# Altium PCB [PCB]_Main.PcbDoc (part 1 of 2)
Units mm, origin at the board's own origin, x right, y up, seen from the top; angles counter-clockwise.
Board outline 74 x 97 mm, 2 copper layers (Top Layer, Bottom Layer); 95 components, 55 nets, 265 pads, 42 vias.
Unrouted connection lines stored in the file: 7.
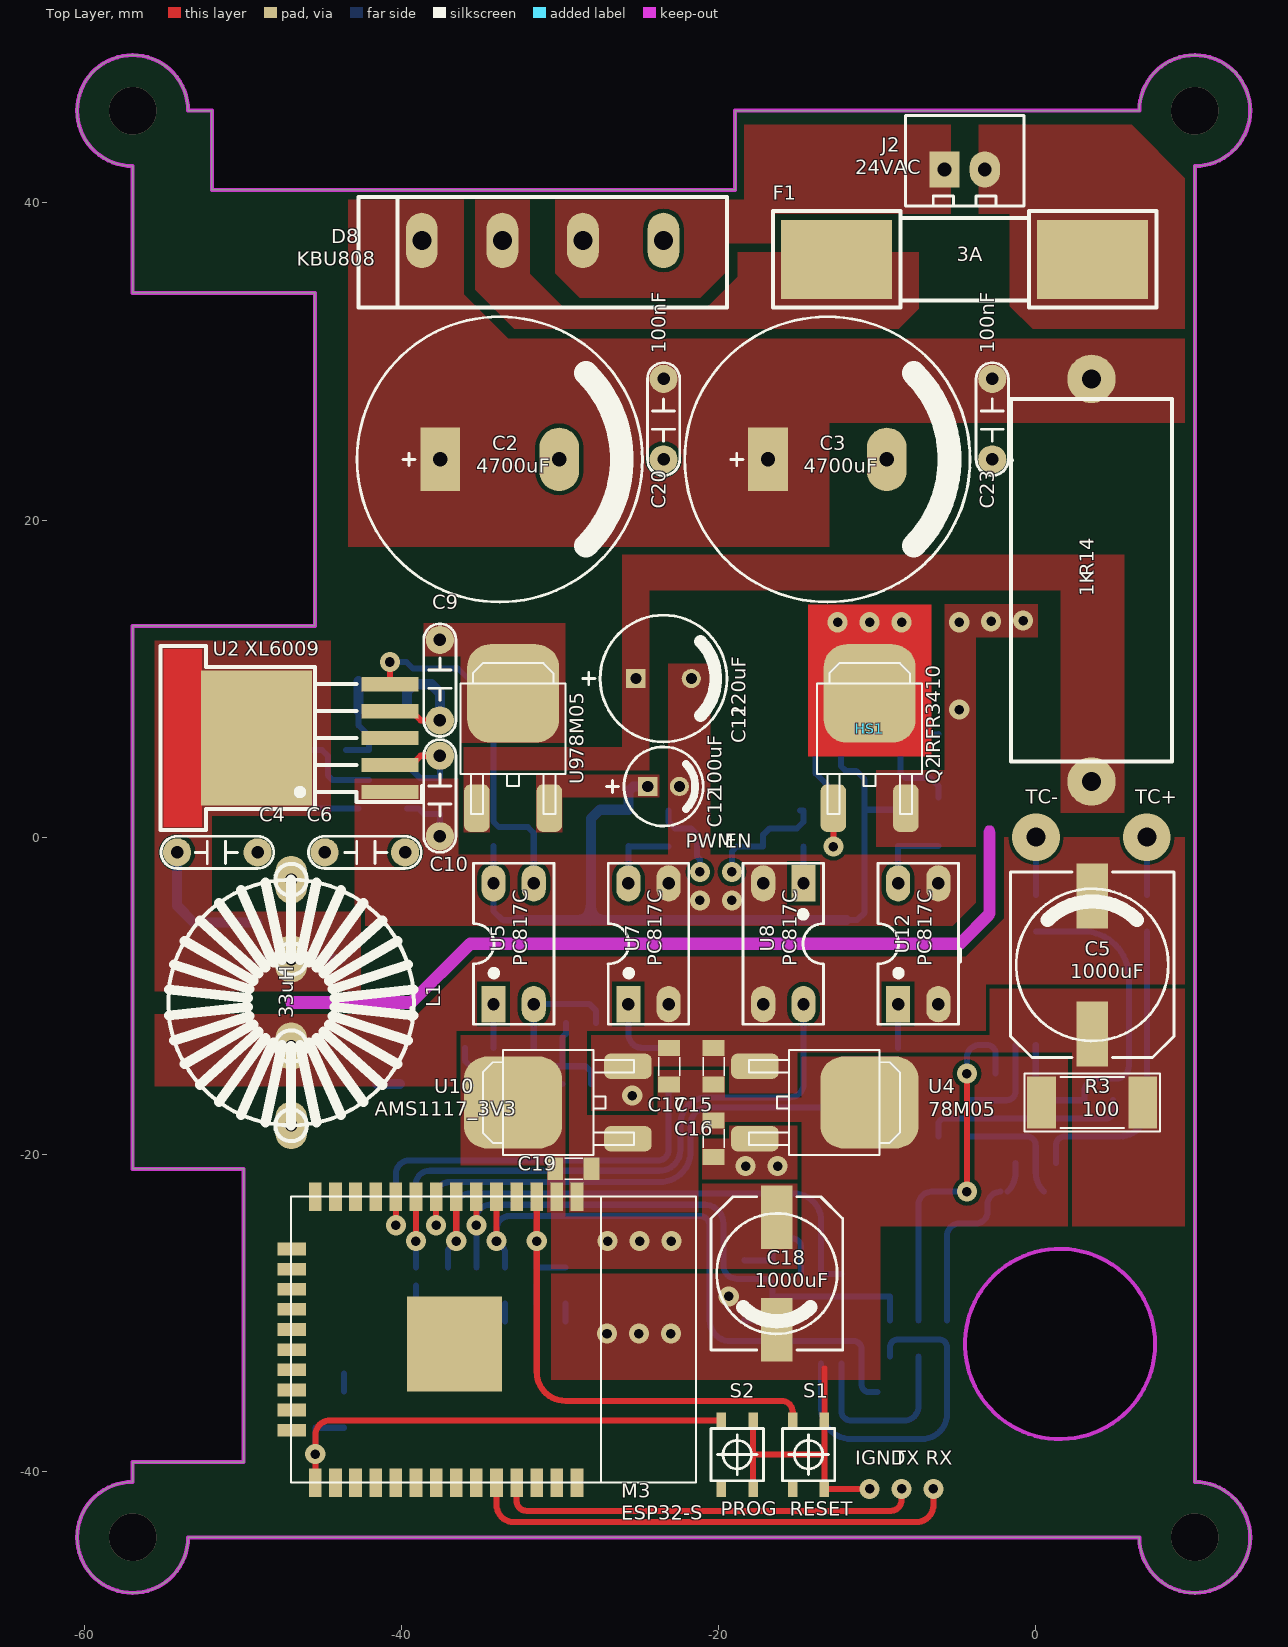
[diagram p0: Top Layer view]
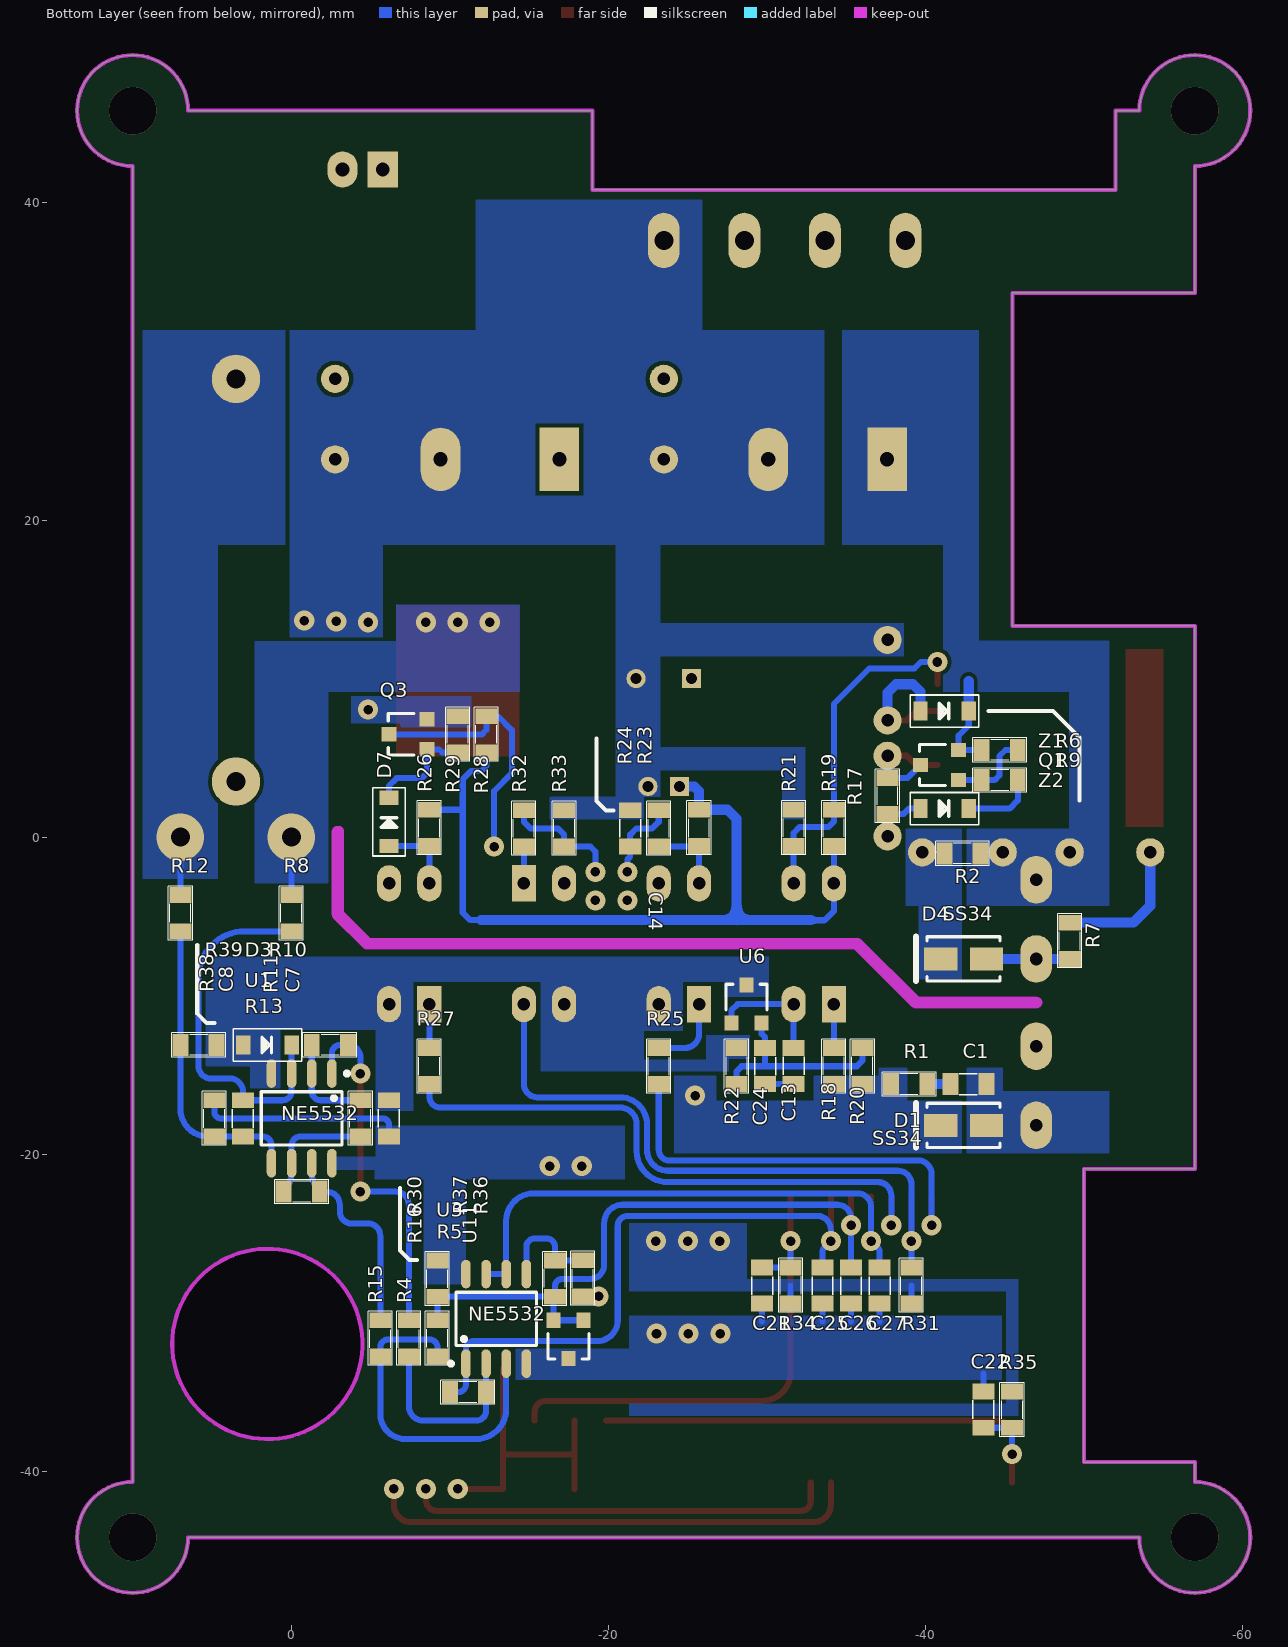
[diagram p1: Bottom Layer view, seen from below]
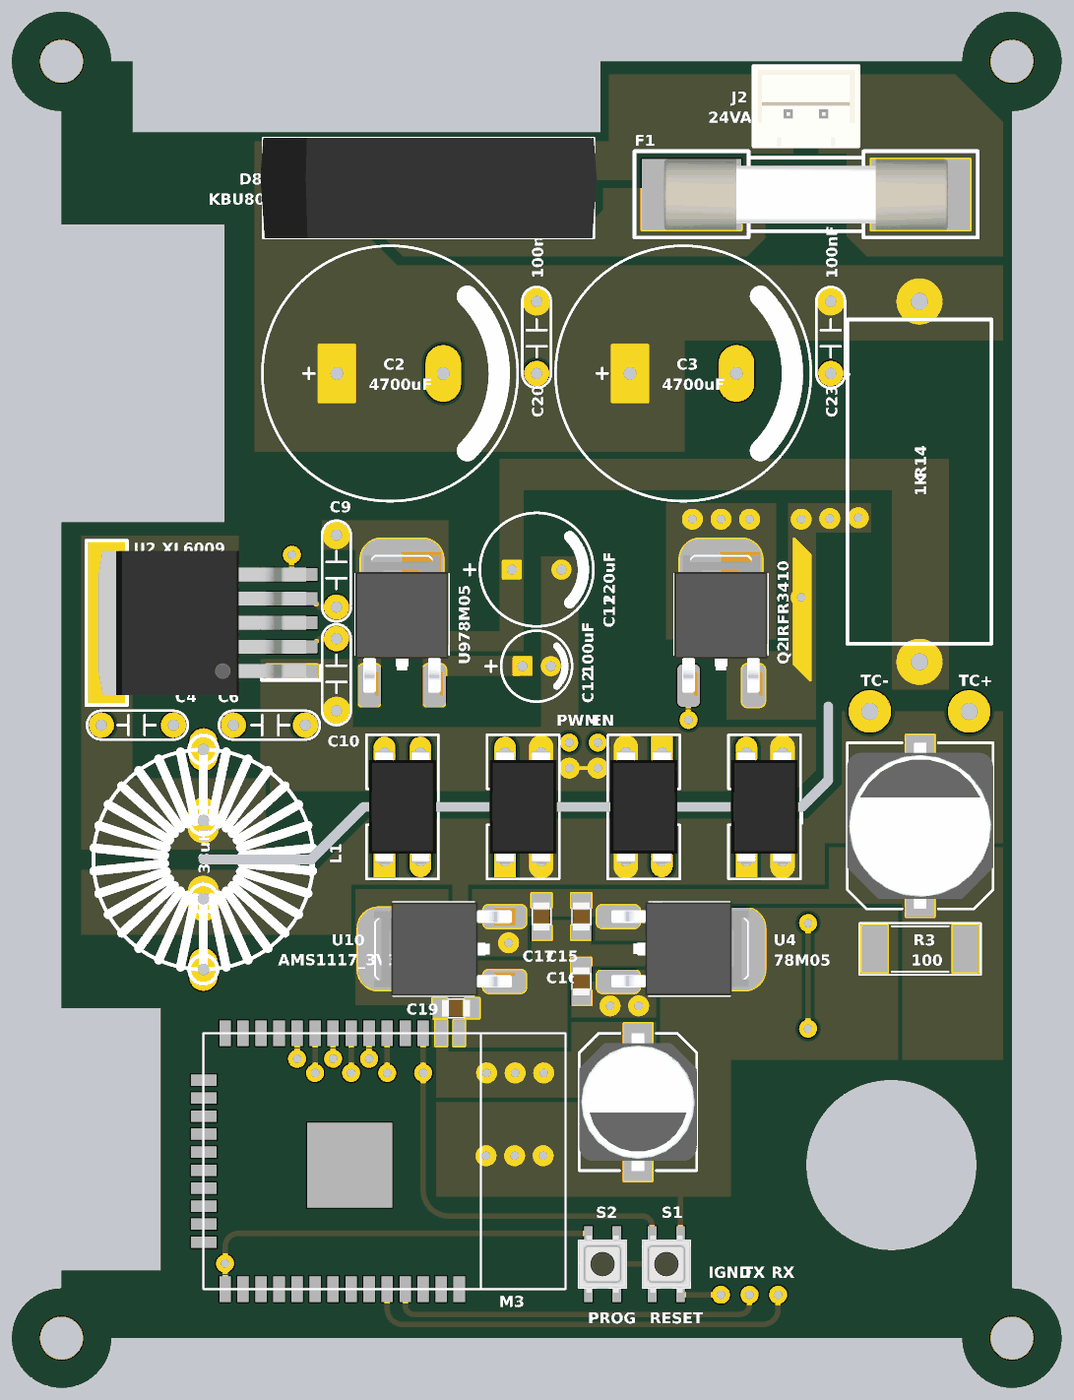
[diagram p2: 3D render of the assembled board from above, using the file's embedded part models]
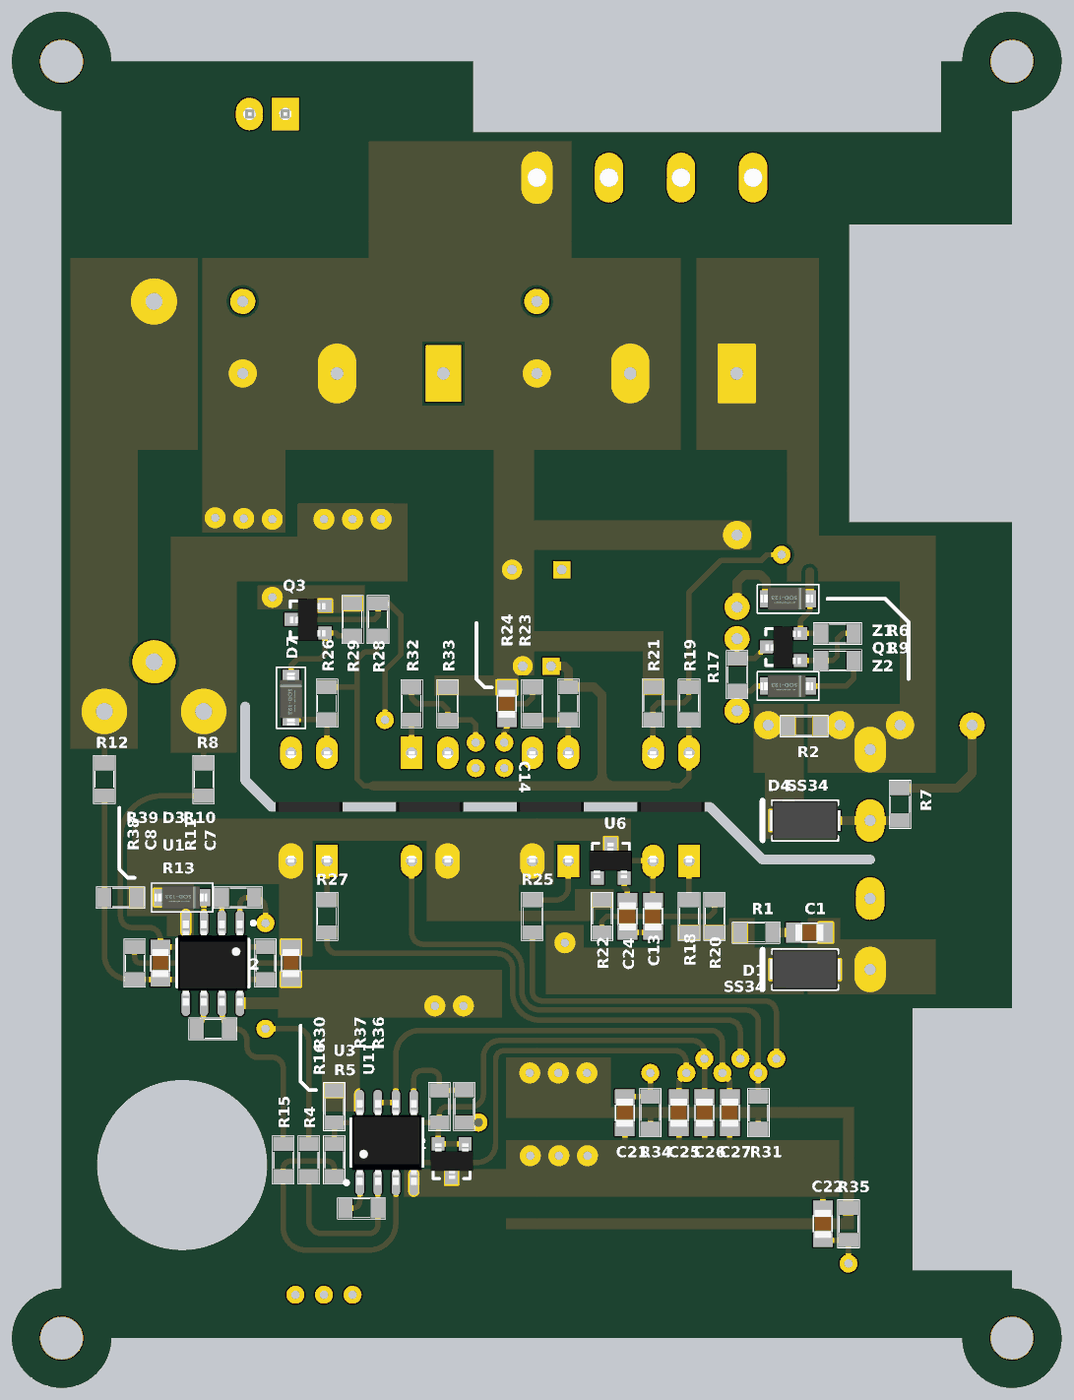
[diagram p3: 3D render of the assembled board from below, using the file's embedded part models]

## Layer stack, top to bottom
Top Solder: solder mask 0.0102, Solder Resist, Dk 3.5
Top Layer: signal copper 0.0356
Dielectric 1: dielectric 0.32, FR-4, Dk 4.8
Bottom Layer: signal copper 0.0356
Bottom Solder: solder mask 0.0102, Solder Resist, Dk 3.5

## Board outline
-56.983,-40.676 -56.983,-39.426 -49.983,-39.426 -49.983,-20.926 -56.983,-20.926 -56.983,13.324 -45.483,13.324 -45.483,34.324 -56.983,34.324 -56.983,42.324 cw(c-56.983,45.824) -53.483,45.824 -51.983,45.824 -51.983,40.824 -18.983,40.824 -18.983,45.824 6.517,45.824 cw(c10.017,45.824) 10.017,42.324 10.017,-40.676 cw(c10.017,-44.176) 6.517,-44.176 -53.483,-44.176 cw(c-56.983,-44.176)
cut-out: -46.986,-10.787 -39.387,-10.787 ccw(c-39.387,-10.437) -39.139,-10.685 -35.534,-7.079 -4.804,-7.079 ccw(c-4.804,-6.729) -4.556,-6.977 -2.687,-5.107 ccw(c-2.934,-4.859) -2.584,-4.859 -2.584,0.348 ccw(c-2.934,0.348) -3.285,0.348 -3.285,-4.714 -4.949,-6.378 -35.679,-6.378 ccw(c-35.679,-6.729) -35.927,-6.481 -39.532,-10.087 -46.986,-10.087 ccw(c-46.986,-10.437)
cut-out: -4.483,-31.976 ccw(c1.517,-31.976) 1.517,-37.976 ccw(c1.517,-31.976) 7.517,-31.976 ccw(c1.517,-31.976) 1.517,-25.976 ccw(c1.517,-31.976)

## Design rules (kind name [scope] priority, off if disabled: settings)
Clearance [All] p1: gap=0.254 ignorepadtopadclearanceinfootprint=FALSE except(0: Arc-Hole Track-Hole SMDPad-Hole THPad-Hole Via-Hole Fill-Hole Poly-Hole Region-Hole Text-Hole)
PolygonConnect [All] p1: connectstyle=Direct reliefconductorwidth=0.508 reliefentries=4 polygonreliefangle="90 Angle" airgapwidth=0.254
RoutingVias [All] p1: holewidth=0.711 width=1.27 viastyle="Through Hole" minholewidth=0.711 minwidth=1.27 maxholewidth=0.711 maxwidth=1.27
SolderMaskExpansion [All] p1: expansion=0.102
Width [All] p1: maxlimit=1.143 minlimit=0.381 preferedwidth=0.635 minimp=50.000000 maximp=50.000000 favimp=50.000000
30 further rules are at their usual default settings.

## Components (designator, comment, footprint, x,y, rotation, side; value= is the part's Value field where it differs from the comment)
C1 "104" CAP-SMD-0805 -42.708,-15.587 r180 bottom
C2 "4700uF" CAP_AL_DIP_18X35 -33.826,23.824 r0 top
C3 "4700uF" CAP_AL_DIP_18X35 -13.156,23.824 r0 top
C4 "104" CAP_NON_200mil -54.175,-0.965 r0 top
C5 "1000uF" CAP_SMD_G 3.549,-8.061 r90 top
C6 "104" CAP_NON_200mil -39.791,-0.965 r180 top
C7 "104" CAP-SMD-0805 -6.154,-17.743 r270 bottom
C8 "33pF" CAP-SMD-0805 3.056,-17.743 r90 bottom
C9 "104" CAP_NON_200mil -37.602,12.437 r270 top
C10 "104" CAP_NON_200mil -37.602,5.129 r270 top
C11 "220uF" CAP_AL_DIP_8x11.5 -23.491,9.997 r0 top
C12 "100uF" CAP_AL_DIP_5x11 -23.491,3.192 r0 top
C13 "103" CAP-SMD-0805 -31.679,-14.444 r270 bottom
C14 "103" CAP-SMD-0805 -21.372,0.547 r270 bottom
C15 "104" CAP-SMD-0805 -20.334,-14.458 r90 top
C16 "104" CAP-SMD-0805 -20.334,-19.03 r270 top
C17 "104" CAP-SMD-0805 -23.144,-14.458 r90 top
C18 "1000uF" CAP_SMD_F -16.343,-27.539 r270 top
C19 "104" CAP-SMD-0805 -29.176,-20.926 r180 top
C20 "100nF" CAP_NON_200mil -23.491,23.824 r90 top
C21 "103" CAP-SMD-0805 -29.689,-28.284 r90 bottom
C22 "103" CAP-SMD-0805 -43.652,-36.118 r270 bottom
C23 "100nF" CAP_NON_200mil -2.758,23.824 r90 top
C24 "103" CAP-SMD-0805 -29.879,-14.444 r90 bottom
C25 "102" CAP-SMD-0805 -33.499,-28.284 r90 bottom
C26 "102" CAP-SMD-0805 -35.299,-28.284 r90 bottom
C27 "102" CAP-SMD-0805 -37.099,-28.284 r90 bottom
D1 "SS34" DO-214AC -42.508,-18.207 r90 bottom
D3 "1N4007" DIO-SMD-123 1.51,-13.118 r0 bottom
D4 "SS34" DO-214AC -42.508,-7.707 r90 bottom
D7 "1N4007" DIO-SMD-123 -6.157,0.962 r270 bottom
D8 "KBU808" DIODE_KBU -31.116,37.631 r180 top
F1 "3A" FUSE_SMD_DIP -4.497,36.447 r180 top
HS1 "ALU_8.8X8.8X5" HEATSINK_ALU_8.8X8.8X5_TO252 -10.495,6.84 r0 top
J2 "24VAC" "Header 2P" -4.497,42.113 r0 top
L1 "33uH" IND_4426_COUPLED -46.986,-10.437 r270 top
M3 "ESP32-S" ESP32-S-Footprint -46.983,-22.684 r270 top
Q1 "SS8550" SOT23(123) -40.878,4.543 r90 bottom
Q2 "IRFR3410" TO252AA -10.495,5.888 r0 top
Q3 "SS8050" SOT23(123) -7.357,6.486 r90 bottom
R1 "330" RES_330_SMD_0805 -38.965,-15.587 r180 bottom
R2 "10K" RES_10K_SMD_0805 -42.331,-1.036 r180 bottom
R3 "100" RES_100_SMD_2512 3.549,-16.744 r0 top
R4 "10K" RES_10K_SMD_0805 -7.41,-31.623 r90 bottom
R5 "10K" RES_10K_SMD_0805 -11.137,-35.017 r180 bottom
R6 "10K" RES_10K_SMD_0805 -44.678,5.493 r0 bottom
R7 "10K" RES_10K_SMD_0805 -49.095,-6.544 r90 bottom
R8 "20K" RES_20K_SMD_0805 0,-4.8 r270 bottom
R9 "10K" RES_10K_SMD_0805 -44.678,3.593 r0 bottom
R10 "10K" RES_10K_SMD_0805 -2.427,-13.118 r0 bottom
R11 "10K" RES_10K_SMD_0805 -4.354,-17.743 r270 bottom
R12 "20K" RES_20K_SMD_0805 7,-4.8 r270 bottom
R13 "10K" RES_10K_SMD_0805 -0.649,-22.368 r0 bottom
R14 "1K" RES_1K_5W_AXIAL_1000MIL 3.5,16.2 r90 top value=0.1
R15 "10K" RES_10K_SMD_0805 -5.61,-31.623 r90 bottom
R16 "10K" RES_10K_SMD_0805 -9.21,-31.623 r270 bottom
R17 "10K" RES_10K_SMD_0805 -37.602,2.589 r270 bottom
R18 "5K6" RES_5K6_SMD_0805 -34.219,-14.444 r270 bottom
R19 "5K6" RES_5K6_SMD_0805 -34.219,0.581 r270 bottom
R20 "5K6" RES_5K6_SMD_0805 -36.019,-14.444 r270 bottom
R21 "1K2" RES_1K2_SMD_0805 -31.679,0.581 r270 bottom
R22 "3K" RES_3K_SMD_0805 -28.079,-14.444 r270 bottom
R23 "5K6" RES_5K6_SMD_0805 -25.712,0.581 r90 bottom
R24 "120K" RES_120K_SMD_0805 -23.172,0.547 r270 bottom
R25 "3K" RES_3K_SMD_0805 -23.172,-14.444 r90 bottom
R26 "5K6" RES_5K6_SMD_0805 -8.697,0.581 r90 bottom
R27 "3K" RES_3K_SMD_0805 -8.697,-14.444 r90 bottom
R28 "3K" RES_3K_SMD_0805 -12.297,6.475 r270 bottom
R29 "20K" RES_20K_SMD_0805 -10.497,6.475 r270 bottom
R30 "1K2" RES_1K2_SMD_0805 -9.21,-27.852 r90 bottom
R31 "3K" RES_3K_SMD_0805 -39.109,-28.284 r90 bottom
R32 "3K" RES_3K_SMD_0805 -14.665,0.546 r270 bottom
R33 "5K6" RES_5K6_SMD_0805 -17.205,0.547 r270 bottom
R34 "3K" RES_3K_SMD_0805 -31.489,-28.284 r270 bottom
R35 "3K" RES_3K_SMD_0805 -45.459,-36.118 r90 bottom
R36 "10K" RES_10K_SMD_0805 -18.376,-27.833 r90 bottom
R37 "10K" RES_10K_SMD_0805 -16.62,-27.852 r270 bottom
R38 "10K" RES_10K_SMD_0805 4.856,-17.743 r90 bottom
R39 "10K" RES_10K_SMD_0805 5.857,-13.118 r0 bottom
S1 "RESET" SW_TACT_3X3X1.5_SMD -14.343,-38.955 r90 top
S2 "PROG" SW_TACT_3X3X1.5_SMD -18.843,-38.955 r90 top
U1 "NE5532" SOIC-8S -0.649,-17.743 r270 bottom
U2 "XL6009" TO263 -49.168,6.243 r90 top
U3 "NE5532" SOIC-8S -12.915,-30.392 r90 bottom
U4 "78M05" TO252AA -13.67,-16.744 r270 top
U5 "PC817C" DIP4 -32.949,-6.729 r0 top
U6 "TL431" SOT23(132) -28.707,-10.539 r180 bottom
U7 "PC817C" DIP4 -24.442,-6.729 r0 top
U8 "PC817C" DIP4 -15.935,-6.729 r180 top
U9 "78M05" TO252AA -32.983,5.888 r0 top
U10 "AMS1117_3V3" TO252AA -29.808,-16.744 r90 top
U11 "TL431" SOT23(132) -17.477,-31.68 r0 bottom
U12 "PC817C" DIP4 -7.427,-6.729 r0 top
Z1 "6V8" DIO-SMD-123 -41.202,7.943 r0 bottom
Z2 "10V" DIO-SMD-123 -41.202,1.793 r0 bottom

## Footprints (in the part's own frame and the unit in brackets; to place one, negate y for a bottom-side part, rotate by r counter-clockwise, add the part's x,y. Pads: shape width x height; smd on the part's side, far side on the other; paste and mask are expansions set on the pad)
CAP-SMD-0805 [mil]
  rect 39.37x55 smd: 1(-45,0) 2(45,0)
  silkscreen extent -23,-26 22,26, body extent -39,-24 39,24, height 37
CAP_AL_DIP_5x11 [mm]
  rect 1.208x1.208 hole 0.7: 1(-1,0)
  round 1.208 hole 0.7: 2(1,0)
  silkscreen extent -3.6,-2.5 2.5,2.5, body extent -2.54,-2.5 2.5,3.81, height 11
CAP_AL_DIP_8x11.5 [mm]
  rect 1.208x1.208 hole 0.7: 1(-1.75,0)
  round 1.208 hole 0.7: 2(1.75,0)
  silkscreen extent -5.1,-4 4,4, body extent -4,-4 4,4, height 11.55
CAP_AL_DIP_18X35 [mm]
  rect 2.5x4 hole 0.9: 1(-3.75,0)
  oval 2.5x4 hole 0.9: 2(3.75,0)
  silkscreen extent -9,-9 9,9, body extent -9.14,-9.14 9.14,9.14, height 35
CAP_NON_200mil [mil]
  round 70 hole 31: 1(0,0) 2(200,0)
  silkscreen extent -40,-40 240,40, body extent -15,-33 215,33, height 288
CAP_SMD_F [mm]
  rect 4x2 smd: 1(-3.55,0) 2(3.55,0)
  silkscreen extent -4.85,-4.15 4.83,4.15, body extent -4.85,-4.15 4.85,4.15, height 10.2
CAP_SMD_G [mm]
  rect 4.1x2 smd: 1(-4.35,0) 2(4.35,0)
  silkscreen extent -5.85,-5.15 5.85,5.15, body extent -5.85,-5.15 5.85,5.15, height 10.2
DIO-SMD-123 [mm]
  rect 0.9x1.2 smd: 1(1.524,0) 2(-1.524,0)
  silkscreen extent -2.16,-1.02 2.16,1.02, body extent -1.76,-0.8 1.94,0.8, height 1.25
DIODE_KBU [mm]
  oval 2x3.5 hole 1.2: 1(-2.54,0) 2(2.54,0) 3(-7.62,0) 4(7.62,0)
  silkscreen extent -11.62,-2.75 11.62,4.23, body extent -11.85,-2.81 11.85,4.29, height 19.3
DIP4 [mil]
  rect 60x90 hole 31: 1(-50,-150)
  oval 60x90 hole 31: 2(50,-150) 3(50,150) 4(-50,150)
  silkscreen extent -100,-200 100,200, body extent -93,-155 93,155, height 185
DO-214AC [mm]
  rect 1.45x2.1 smd: 1(0.02,-1.343) 2(0.02,1.557)
  silkscreen extent -1.38,-2.19 1.42,3.11, body extent -1.37,-2.41 1.41,2.63, height 2.29
ESP32-S-Footprint [mm]
  rect 1.8x0.8 smd: 1(0,18.034) 2(0,16.764) 3(0,15.494) 4(0,14.224) 5(0,12.954) 6(0,11.684) 7(0,10.414) 8(0,9.144) 9(0,7.874) 10(0,6.604) 11(0,5.334) 12(0,4.064) 13(0,2.794) 14(0,1.524) 25(18.034,1.524) 26(18.034,2.794) 27(18.034,4.064) 28(18.034,5.334) 29(18.034,6.604) 30(18.034,7.874) 31(18.034,9.144) 32(18.034,10.414) 33(18.034,11.684) 34(18.034,12.954) 35(18.034,14.224) 36(18.034,15.494) 37(18.034,16.764) 38(18.034,18.034)
  rect 0.8x1.8 smd: 15(3.3,0.034) 16(4.57,0.034) 17(5.84,0.034) 18(7.11,0.034) 19(8.38,0.034) 20(9.65,0.034) 21(10.92,0.034) 22(12.19,0.034) 23(13.46,0.034) 24(14.73,0.034)
  rect 6x6 smd: 101(9.3,10.3)
  silkscreen extent 0,0 18.03,25.53, body extent 0,0 18.03,25.53, height 2
FUSE_SMD_DIP [mm]
  rect 7x5 smd: 1(-8.077,0.013) 2(8.077,0.013)
  silkscreen extent -12.1,-3.05 12.1,3.05, body extent -10,-2.49 10,2.51
"Header 2P" [mil] "CON2"
  rect 75x90 hole 34: 1(-50,0)
  oval 75x90 hole 34: 2(50,0)
  silkscreen extent -147,-91 147,134, body extent -148,-90 148,134, height 277
HEATSINK_ALU_8.8X8.8X5_TO252 [mm]
  body extent -4.4,-4.4 4.4,4.4, height 7.85
IND_4426_COUPLED [mm]
  oval 3x2 hole 0.8: 1(-7.75,0) 2(-2.75,0) 3(7.75,0) 4(2.75,0)
  silkscreen extent -8.75,-7.75 8.75,7.75, body extent -8.28,-8.29 8.29,8.3, height 8.65
RES_1K2_SMD_0805 [mil]
  rect 39.37x55 smd mask+1.97: 1(-45,0) 2(45,0)
  silkscreen extent -67,-30 67,30, body extent -39,-25 39,25, height 20
RES_1K_5W_AXIAL_1000MIL [mil] "R5W , 2 pin, 400 x 950mil"
  round 120 hole 47.24: 1(-500,0) 2(500,0)
  silkscreen extent -450,-200 450,200, body extent -520,-191 520,191, height 365
RES_3K_SMD_0805 [mil]
  rect 39.37x55 smd mask+1.97: 1(-45,0) 2(45,0)
  silkscreen extent -67,-30 67,30, body extent -39,-25 39,25, height 20
RES_5K6_SMD_0805 [mil]
  rect 39.37x55 smd mask+1.97: 1(-45,0) 2(45,0)
  silkscreen extent -67,-30 67,30, body extent -39,-25 39,25, height 20
RES_10K_SMD_0805 [mil]
  rect 39.37x55 smd mask+1.97: 1(-45,0) 2(45,0)
  silkscreen extent -67,-30 67,30, body extent -39,-25 39,25, height 20
RES_20K_SMD_0805 [mil]
  rect 39.37x55 smd mask+1.97: 1(-45,0) 2(45,0)
  silkscreen extent -67,-30 67,30, body extent -39,-25 39,25, height 20
RES_100_SMD_2512 [mm] "Chip Capacitor, Body 3.2x2.5mm, IPC Medium Density"
  rect 1.8x3.3 smd: 1(-3.2,0) 2(3.2,0)
  silkscreen extent -4.28,-1.83 4.28,1.83, body extent -3.15,-1.6 3.15,1.6, height 0.71
RES_120K_SMD_0805 [mil]
  rect 39.37x55 smd mask+1.97: 1(-45,0) 2(45,0)
  silkscreen extent -67,-30 67,30, body extent -39,-25 39,25, height 20
RES_330_SMD_0805 [mil]
  rect 39.37x55 smd mask+1.97: 1(-45,0) 2(45,0)
  silkscreen extent -67,-30 67,30, body extent -39,-25 39,25, height 20
SOIC-8S [mm] "SOIC, 8-Leads, Body 4.9x3.9mm, Pitch 1.27mm, IPC High Density"
  oval 1.8x0.6 smd: 1(-2.825,1.905) 2(-2.825,0.635) 3(-2.825,-0.635) 4(-2.825,-1.905) 5(2.825,-1.905) 6(2.825,-0.635) 7(2.825,0.635) 8(2.825,1.905)
  silkscreen extent -2.95,-2.55 1.68,2.98, body extent -2.99,-2.45 3,2.45, height 1.6
SOT23(123) [mm]
  rect 0.9x0.95 smd: 1(-0.95,-1.2) 2(0,1.2) 3(0.95,-1.2)
  silkscreen extent -1.3,-0.38 1.3,1.25, body extent -1.52,-1.23 1.48,1.27, height 1.06
SOT23(132) [mm]
  rect 0.9x0.95 smd: 1(-0.95,-1.2) 2(0.95,-1.2) 3(0,1.2)
  silkscreen extent -1.3,-0.38 1.3,1.25, body extent -1.52,-1.23 1.48,1.27, height 1.06
SW_TACT_3X3X1.5_SMD [mm]
  rect 1x0.6 smd: 1(-2.163,1) 1(2.163,1) 2(-2.163,-1) 2(2.163,-1)
  silkscreen extent -1.65,-1.65 1.65,1.65, body extent -2.01,-1.69 2.01,1.69, height 1.47
TO252AA [mm]
  rrect50% 1.6x3 smd: 1(-2.286,-4.064) 3(2.286,-4.064)
  rrect50% 5.8x6.2 smd: 2(0,3.175)
  silkscreen extent -3.3,-4.44 3.3,5.08, body extent -3.3,-4.82 3.28,5.32, height 2.3
TO263 [mm]
  rect 0.9x3.58 smd: 1(-3.4,-8.42) 2(-1.7,-8.42) 3(0,-8.42) 4(1.7,-8.42) 5(3.4,-8.42)
  rect 8.5x7 smd: 3(0,0)
  Top Layer region: -5.6,5.842 5.6,5.842 5.6,3.454 -5.6,3.454
  silkscreen extent -5.8,-10.44 5.8,6.07, body extent -5.08,-9.42 5.08,5.22, height 4.57

## Part data
C1 C7 C15 C16 C17 C19 C25 C26 C27: library part CAP_NON_100NF_0805, "Multilayer SMD Ceramic Capacitors, Vmax 50V", Package=SMD, Temperature Range="-55 to +125 degC", ComponentLink1Description=Datasheet, ComponentLink1URL=E:\NEW_DATA\ELECTRONIC_DOCUMENT\DATASHEET\1723208.pdf, Container=Capacitors_Box, Label=0805-100NF, Manufacturer=https://shopee.vn/Set-100-T%E1%BB%A5-%C4%90i%E1%BB%87n-G%E1%BB%91m-0805-SMD-100pF-47uF-100pF-1nF-10nF-100nF-0.1uF-1uF-2.2uF-4.7uF-10uF-22uF-i.778834786.13694429713, Price=0.006, Stock=76
C2 C3: library part CAP_POL_4700UF_50V_DIP, "RS PRO Through Hole Aluminium Electrolytic Capacitor Low-ESR", Package=TH, Temperature Range="-40 to +105 degC", ComponentLink1Description=Datasheet, ComponentLink1URL=E:\NEW_DATA\ELECTRONIC_DOCUMENT\DATASHEET\0900766b8173e32a.pdf, Container=Capacitors_Box, Label=4700UF-50V, Manufacturer=https://shopee.vn/-2-CON-(G39.4)-T%E1%BB%A5-h%C3%B3a-4-700uF-50V-(18x35mm)-(4700uF-50V)-i.29971197.1779362195?sp_atk=89aaee08-9251-40b8-862a-376625eebb3c&xptdk=89aaee08-9251-40b8-862a-376625eebb3c, Price=0.8, Stock=0
C4 C6 C9 C10 C20 C23: library part CAP_NON_100NF_50V_DIP, "Ceramic Disc Capacitors, MCCHU Series", Package=TH, Temperature Range="-25 to +85 degC", ComponentLink1Description=Datasheet, ComponentLink1URL=E:\NEW_DATA\ELECTRONIC_DOCUMENT\DATASHEET\2577800.pdf, Container=Capacitors_Box, Label=100nF-50V, Manufacturer=https://shopee.vn/Set-100-T%E1%BB%A5-G%E1%BB%91m-50V-1pF-~-100nF-0.1uF-104-4.7PF-10PF-22PF-33PF-47PF-100PF-101-220PF-10NF-10NF-330PF-470PF-1NF-103-47NF-473-Ch%E1%BA%A5t-L%C6%B0%E1%BB%A3ng-Cao-i.778834786.17975668941?sp_atk=3a5fc38d-5123-497e-86f7-9862871296e1&xptdk=3a5fc38d-5123-497e-86f7-9862871296e1, Price=0.004, Stock=50
C5: library part CAP_POL_1000UF_16V_SMD, "ALUMINUM??ELECTROLYTIC??CAPACITORS", Package=SMD, Temperature Range="-55 to +105 degC", ComponentLink1Description=Datasheet, ComponentLink1URL=E:\NEW_DATA\ELECTRONIC_DOCUMENT\DATASHEET\e-ut.pdf, Container=Capacitors_Box, Label=1000uF-16V, Manufacturer=https://shopee.vn/Set-20-T%E1%BB%A5-%C4%90i%E1%BB%87n-Nh%C3%B4m-Smd-16v-10uf-22uf-33uf-47uf-100uf-220uf-330uf-470uf-680uf-1000uf-Chuy%C3%AAn-D%E1%BB%A5ng-i.395117932.9948514166, Price=0.08, Stock=10
C8: library part CAP_NON_33PF_0805, "Multilayer SMD Ceramic Capacitors, Vmax 50V", Package=SMD, Temperature Range="-55 to +125 degC", ComponentLink1Description=Datasheet, ComponentLink1URL=E:\NEW_DATA\ELECTRONIC_DOCUMENT\DATASHEET\1723208.pdf, Container=Capacitors_Box, Label=0805-33PF, Manufacturer=https://shopee.vn/Set-100-T%E1%BB%A5-%C4%90i%E1%BB%87n-G%E1%BB%91m-0805-SMD-100pF-47uF-100pF-1nF-10nF-100nF-0.1uF-1uF-2.2uF-4.7uF-10uF-22uF-i.778834786.13694429713, Price=0.006, Stock=25
C11: library part CAP_POL_220UF_25V_DIP, "RS PRO Through Hole Aluminium Electrolytic Capacitor Low-ESR, Rs=139mR, Ls=1.0uH", Package=TH, Temperature Range="-40 to +105 degC", ComponentLink1Description=Datasheet, ComponentLink1URL=E:\NEW_DATA\ELECTRONIC_DOCUMENT\DATASHEET\0900766b8173e32a.pdf, Container=Capacitors_Box, Label=220UF-25V, Manufacturer=https://shopee.vn/-10-CON-(G32.2)-T%E1%BB%A5-h%C3%B3a-220uF-25V-(8x12mm)-i.29971197.1779362283?sp_atk=29d1e278-aa24-4bd9-9bae-4cc1236b0b26&xptdk=29d1e278-aa24-4bd9-9bae-4cc1236b0b26, Price=0.04, Stock=14
C12: library part CAP_POL_100UF_16V_DIP, "RS PRO Through Hole Aluminium Electrolytic Capacitor Low-ESR", Package=TH, Temperature Range="-40 to +105 degC", ComponentLink1Description=Datasheet, ComponentLink1URL=E:\NEW_DATA\ELECTRONIC_DOCUMENT\DATASHEET\0900766b8173e32a.pdf, Container=Capacitors_Box, Label=100uF-16V, Manufacturer=https://shopee.vn/-25-CON-T%E1%BB%A5-h%C3%B3a-100uF-16V-(6x7mm)-i.29971197.1779362306, Price=0.028, Stock=46
C13 C14 C21 C22 C24: library part CAP_NON_10NF_0805, "Multilayer SMD Ceramic Capacitors, Vmax 50V", Package=SMD, Temperature Range="-55 to +125 degC", ComponentLink1Description=Datasheet, ComponentLink1URL=E:\NEW_DATA\ELECTRONIC_DOCUMENT\DATASHEET\1723208.pdf, Container=Capacitors_Box, Label=0805-10NF, Manufacturer=https://shopee.vn/Set-100-T%E1%BB%A5-%C4%90i%E1%BB%87n-G%E1%BB%91m-0805-SMD-100pF-47uF-100pF-1nF-10nF-100nF-0.1uF-1uF-2.2uF-4.7uF-10uF-22uF-i.778834786.13694429713, Price=0.006, Stock=89
C18: library part CAP_POL_1000UF_6.3V_SMD, "ALUMINUM??ELECTROLYTIC??CAPACITORS", Package=SMD, Temperature Range="-55 to +105 degC", ComponentLink1Description=Datasheet, ComponentLink1URL=E:\NEW_DATA\ELECTRONIC_DOCUMENT\DATASHEET\e-ut.pdf, Container=Capacitors_Box, Label=1000uF-6.3V, Manufacturer=https://shopee.vn/Set-10-t%E1%BB%A5-%C4%91i%E1%BB%87n-nh%C3%B4m-1uf-220uf-Smd-6.3v-47uf-100uf-220uf-470uf-1000uf-ch%E1%BA%A5t-l%C6%B0%E1%BB%A3ng-cao-i.395117932.8048512997?sp_atk=69990654-f080-47d0-9859-6bc27c5572f2&xptdk=69990654-f080-47d0-9859-6bc27c5572f2, Price=0.1, Stock=9
D1 D4: library part DIODE_SS34_3A_DO-214AC, "Surface-Mount Schottky Barrier Rectifier, Vr=30V", Package=SMD, Temperature Range="-55 to +150 degC", ComponentLink1Description=Datasheet, ComponentLink1URL=E:\NEW_DATA\ELECTRONIC_DOCUMENT\DATASHEET\ss32.pdf, Container=Diodes_Box, Label=Shockley, Manufacturer=https://shopee.vn/-5-CON-(KX)-Diode-D%C3%A1n-SS34-SMA-3A-40V-1N5822-(SMD-D%C3%A1n)-Diode-xung--i.29971197.1930547559?sp_atk=2e39dc6f-7249-4ff0-bc48-5163322d9dd4&xptdk=2e39dc6f-7249-4ff0-bc48-5163322d9dd4, Price=0.12, Stock=0
D3 D7: library part DIODE_1N4007_1A_SOD-323, "1A Rectifier Diodes - Vr 1000V", Package=SMD, Temperature Range="-65 to +175 degC", ComponentLink1Description=Datasheet, ComponentLink1URL=E:\NEW_DATA\ELECTRONIC_DOCUMENT\DATASHEET\1N4007-SMD.pdf, Container=Diodes_Box, Label="1N4007 T7", Manufacturer=https://shopee.vn/Set-100-Mi%E1%BA%BFng-D%C3%A1n-%C4%90i%E1%BB%91t-SMD-0805-SOD-123-1N5819-1N4007-1N4148-SOD123-SOD-323-1206-1N4148WS-1N5819WS-B5819WS-SOD323-i.778834786.19705430997?sp_atk=d684d704-d874-4419-9c16-214feca81d22&xptdk=d684d704-d874-4419-9c16-214feca81d22, Price=0.006, Stock=184
D8: library part DIODE_BRIDGE_KBU808_8A, "SINGLE-PHASE SILICON BRIDGE RECTIFIER, 800V MAX, 560Vrms, 8A.", Package=TH, Temperature Range="-55 to +125 degC", ComponentLink1Description=Datasheet, ComponentLink1URL=E:\NEW_DATA\ELECTRONIC_DOCUMENT\DATASHEET\KBU8005-hornby.pdf, Container=Diodes_Box, Label=DIODE_BRIDGE, Manufacturer=https://shopee.vn/-2-CON-(F17.5)-C%E1%BA%A7u-Diode-KBU808-8A-800V-(8A-d%E1%BA%B9t)-i.29971197.1928264848?sp_atk=6ddc136f-6260-42f4-9059-366cf929f085&xptdk=6ddc136f-6260-42f4-9059-366cf929f085, Price=0.42, Stock=0
F1: library part CON_CAR-FUSE_1A, "RESISTOR-FUSE 1 OHM +-5% 0.5W @70", Package=TH
HS1: library part HEATSINK_ALU_8.8X8.8X5, "HEATSINK ALU 8.8X8.8X5 FROM CHINA", Package=SMD, Temperature Range="-55 to +150 degC", Container=HEATSINK, Label=ALU_8.8X8.8X5, Manufacturer=https://shopee.vn/Set-5-mi%E1%BA%BFng-nh%C3%B4m-t%E1%BA%A3n-nhi%E1%BB%87t-cao-c%E1%BA%A5p-c%E1%BB%A1-8.8x8.8x5mm-cho-chip-nh%E1%BB%9B-LED-i.410956428.9172920161?xptdk=409fad90-44e0-46f3-a162-0b94c27037a3, Price=0.048, Stock=20
J2: library part JP2_IN, Package=TH
L1: library part IND_COUPLED_4426, "Transformer Lpri=33uH; Lsec=33uH.", Package=TH, Temperature Range="-40 to +125 degC", ComponentLink1Description=Datasheet, ComponentLink1URL="E:\NEW_DATA\ELECTRONIC_DOCUMENT\DATASHEET\CWS-1TC-11892 REV.A1.pdf", Container=Inductors_Box, Coupling Factor=0.95, Inductance A=33uH, Inductance B=33uH, Label=4426_33uH, Manufacturer=https://shopee.vn/Set-10-Cu%E1%BB%99n-D%C3%A2y-C%E1%BA%A3m-%E1%BB%A8ng-T%E1%BB%AB-T%C3%ADnh-5026-33-47-68-100UH-6A-i.81431289.15993908560, Price=0.1, Stock=1
M3: library part MD_ESP32-S, "Tensilica Xtensa LX6 microprocessor @ 160 or 240 MHz · 320 KiB SRAM, MCU", Package=SMD, Temperature Range="-40 to +125 degC", ComponentLink1Description=Datasheet, ComponentLink1URL=E:\NEW_DATA\ELECTRONIC_DOCUMENT\DATASHEET\esp-wroom-32_datasheet_en-1223836.pdf, Container=ICs_Box, Label=MCU, Manufacturer=https://shopee.vn/M%C3%B4-%C4%90un-Wifi-Kh%C3%B4ng-D%C3%A2y-Esp32-Esp32-Wroom-Esp32-Wrover-Esp32-Wroom-32D-32U-Esp32-Wrover-I-Ib-B-i.81431289.10939223124, Price=2.3, Stock=0
Q1: library part PNP_SS8550_SOT-23, "PNP Silicon General Purpose Transistor, Vcb=-40V, Ic=-1.5A, Y2", Package=SMD, Temperature Range="-55 to +150 degC", ComponentLink1Description=Datasheet, ComponentLink1URL=E:\NEW_DATA\ELECTRONIC_DOCUMENT\DATASHEET\SS8550.pdf, Container=Transistors_Box, Label=PNP, Manufacturer=https://shopee.vn/B%E1%BB%99-100-M%E1%BA%A1ch-%C4%90i%E1%BB%87n-SS8050-Y1-SS8550-Y2-S8050-J3Y-S8550-2TY-S9012-S9013-S9014-S9015-S9018-TL431-XC6206P332MR-SOT23-XC6206P332-i.778834786.17075451311, Price=0.006, Stock=100
Q2: library part NCH_IRFR3410_TO-252, "HEXFET  Power MOSFET, Vds=100V, Id=31A, Rds=34m", Package=SMD, Temperature Range="-55 to +170 degC", ComponentLink1Description=Datasheet, ComponentLink1URL=E:\NEW_DATA\ELECTRONIC_DOCUMENT\DATASHEET\Infineon-IRFR3410-DataSheet-v01_01-EN.pdf, Container=Transistors_Box, Label=N-CH, Manufacturer=https://item.taobao.com/item.htm?spm=a1z10.3-c-s.w4002-21047669632.10.3f9827e5NgGYbt&id=523832631224, Price=0.15, Stock=0
Q3: library part NPN_SS8050_SOT-23, "NPN Silicon Epitaxial Planar Transistor, Vcb=40V, Ic=1.5A, Y1", Package=SMD, Temperature Range="-55 to +150 degC", ComponentLink1Description=Datasheet, ComponentLink1URL=E:\NEW_DATA\ELECTRONIC_DOCUMENT\DATASHEET\1912111437_Galaxy-SS8050G-Y1_C380930.pdf, Container=Transistors_Box, Label=NPN, Manufacturer=https://shopee.vn/B%E1%BB%99-100-M%E1%BA%A1ch-%C4%90i%E1%BB%87n-SS8050-Y1-SS8550-Y2-S8050-J3Y-S8550-2TY-S9012-S9013-S9014-S9015-S9018-TL431-XC6206P332MR-SOT23-XC6206P332-i.778834786.17075451311, Price=0.005, Stock=87
R1: library part RES_330R_1/8W_0805, "Chip Resistor Surface Mount, 0.125W, Vmax 150V", Package=SMD, Temperature Range="-55 to +155 degC", ComponentLink1Description=Datasheet, ComponentLink1URL=E:\NEW_DATA\ELECTRONIC_DOCUMENT\DATASHEET\RC0805.pdf, Container=Resistors_Box, Label=0805_Pack, Manufacturer=https://shopee.vn/Set-100con-%C4%90I%E1%BB%86N-TR%E1%BB%9E-D%C3%81N-0805-c%C3%A1c-lo%E1%BA%A1i-t%E1%BB%AB-2-OHM-7-3-OHM-9-4-OHM-7-6-OHM-8-8-OHM-2-12-OHM-...750-OHM-i.633971954.14528730832, Price=0.003, Stock=70
R2 R4 R5 R6 R7 R9 R10 R11 R13 R15 R16 R17 R36 R37 R38 R39: library part RES_10K_1/8W_0805, "Chip Resistor Surface Mount, 0.125W, Vmax 150V", Package=SMD, Temperature Range="-55 to +155 degC", ComponentLink1Description=Datasheet, ComponentLink1URL=E:\NEW_DATA\ELECTRONIC_DOCUMENT\DATASHEET\RC0805.pdf, Container=Resistors_Box, Label=0805_Pack, Manufacturer=https://shopee.vn/Set-100con-%C4%90I%E1%BB%86N-TR%E1%BB%9E-D%C3%81N-0805-c%C3%A1c-lo%E1%BA%A1i-t%E1%BB%AB-1K2-3K-5K6-6K8-...820K-1M-i.633971954.15028739620, Price=0.003, Stock=19
R3: library part RES_100R_1/2W_2512, "2512 Thick Film Chip Resistor, 0.5W, Vmax 200V", Package=SMD, Temperature Range="-55 to +155 degC", ComponentLink1Description=Datasheet, ComponentLink1URL=E:\NEW_DATA\ELECTRONIC_DOCUMENT\DATASHEET\2512std.pdf, Container=Resistors_Box, Label="2512-100R 5%", Manufacturer=https://shopee.vn/Set-50-chip-%C4%90i%E1%BB%87n-T%E1%BB%AD-2512-SMD-5-1W-0.1R-0.01R-0.05R-0.001R-0.33R-1R-0R-10R-100R-2W-0.001-0.01-0.13-0.05-1-0-10-100-ohm-i.778834786.21104749216, Price=0.003, Stock=46
R8 R12 R29: library part RES_20K_1/8W_0805, "Chip Resistor Surface Mount, 0.125W, Vmax 150V", Package=SMD, Temperature Range="-55 to +155 degC", ComponentLink1Description=Datasheet, ComponentLink1URL=E:\NEW_DATA\ELECTRONIC_DOCUMENT\DATASHEET\RC0805.pdf, Container=Resistors_Box, Label=0805_Pack, Manufacturer=https://shopee.vn/Set-100con-%C4%90I%E1%BB%86N-TR%E1%BB%9E-D%C3%81N-0805-c%C3%A1c-lo%E1%BA%A1i-t%E1%BB%AB-1K2-3K-5K6-6K8-...820K-1M-i.633971954.15028739620, Price=0.003, Stock=89
R14: library part RES_1K_5W_AXIAL, "Cement Fixed Resistors Axial Leaded", Package=TH, Temperature Range="-55 to +155 degC", ComponentLink1Description=Datasheet, ComponentLink1URL=E:\NEW_DATA\ELECTRONIC_DOCUMENT\DATASHEET\3178893.pdf, Container=Resistors_TH_Box, Label=1K_5W, Manufacturer=https://shopee.vn/%C4%90i%E1%BB%87n-tr%E1%BB%9F-s%E1%BB%A9-5W-5-b%E1%BB%99-5-con-c%C3%A1c-lo%E1%BA%A1i-0.1R-100K-i.101915397.11507078815, Price=0.08, Stock=3
R18 R19 R20 R23 R26 R33: library part RES_5K6_1/8W_0805, "Chip Resistor Surface Mount, 0.125W, Vmax 150V", Package=SMD, Temperature Range="-55 to +155 degC", ComponentLink1Description=Datasheet, ComponentLink1URL=E:\NEW_DATA\ELECTRONIC_DOCUMENT\DATASHEET\RC0805.pdf, Container=Resistors_Box, Label=0805_Pack, Manufacturer=https://shopee.vn/Set-100con-%C4%90I%E1%BB%86N-TR%E1%BB%9E-D%C3%81N-0805-c%C3%A1c-lo%E1%BA%A1i-t%E1%BB%AB-1K2-3K-5K6-6K8-...820K-1M-i.633971954.15028739620, Price=0.003, Stock=40
R21 R30: library part RES_1K2_1/8W_0805, "Chip Resistor Surface Mount, 0.125W, Vmax 150V", Package=SMD, Temperature Range="-55 to +155 degC", ComponentLink1Description=Datasheet, ComponentLink1URL=E:\NEW_DATA\ELECTRONIC_DOCUMENT\DATASHEET\RC0805.pdf, Container=Resistors_Box, Label=0805_Pack, Manufacturer=https://shopee.vn/Set-100con-%C4%90I%E1%BB%86N-TR%E1%BB%9E-D%C3%81N-0805-c%C3%A1c-lo%E1%BA%A1i-t%E1%BB%AB-1K2-3K-5K6-6K8-...820K-1M-i.633971954.15028739620, Price=0.003, Stock=50
R22 R25 R27 R28 R31 R32 R34 R35: library part RES_3K_1/8W_0805, "Chip Resistor Surface Mount, 0.125W, Vmax 150V", Package=SMD, Temperature Range="-55 to +155 degC", ComponentLink1Description=Datasheet, ComponentLink1URL=E:\NEW_DATA\ELECTRONIC_DOCUMENT\DATASHEET\RC0805.pdf, Container=Resistors_Box, Label=0805_Pack, Manufacturer=https://shopee.vn/Set-100con-%C4%90I%E1%BB%86N-TR%E1%BB%9E-D%C3%81N-0805-c%C3%A1c-lo%E1%BA%A1i-t%E1%BB%AB-1K2-3K-5K6-6K8-...820K-1M-i.633971954.15028739620, Price=0.003, Stock=78
R24: library part RES_120K_1/8W_0805, "Chip Resistor Surface Mount, 0.125W, Vmax 150V", Package=SMD, Temperature Range="-55 to +155 degC", ComponentLink1Description=Datasheet, ComponentLink1URL=E:\NEW_DATA\ELECTRONIC_DOCUMENT\DATASHEET\RC0805.pdf, Container=Resistors_Box, Label=0805_Pack, Manufacturer=https://shopee.vn/Set-100con-%C4%90I%E1%BB%86N-TR%E1%BB%9E-D%C3%81N-0805-c%C3%A1c-lo%E1%BA%A1i-t%E1%BB%AB-1K2-3K-5K6-6K8-...820K-1M-i.633971954.15028739620, Price=0.003, Stock=99
S1 S2: library part CON_BUTTON_3X3X1.5MM_SMD, "Tact switch (Tactile Switch), 50mA, 12VDC.", Package=TH, Temperature Range="-25 to +85 degC", ComponentLink1Description=Datasheet, ComponentLink1URL=E:\NEW_DATA\ELECTRONIC_DOCUMENT\DATASHEET\tact-switch.pdf, Container=Connector_Fuse_Box, Label="Tact Switch 4.5X4.5X5", Manufacturer=https://shopee.vn/N%C3%BAt-Nh%E1%BA%A5n-4-Ch%C3%A2n-Vu%C3%B4ng-%C4%90en-i.101915397.10716198032, Price=0.028, Stock=10
U1 U3: library part IC_OPAMP_NE5532_SOIC-8, "NE5532x, SA5532x Dual Low-Noise Operational Amplifiers.", Package=SMD, Temperature Range="-40 to +85 degC", ComponentLink1Description=Datasheet, ComponentLink1URL=E:\NEW_DATA\ELECTRONIC_DOCUMENT\DATASHEET\ne5532.pdf, Container=ANALOG_IC_BOX, Label=OPAMP, Manufacturer=https://shopee.vn/Set-20-Linh-Ki%E1%BB%87n-%C4%90i%E1%BB%87n-T%E1%BB%AD-NE5532DR-SOP8-NE5532-SOP-N5532-5532DR-SOP-8-SMD-Chuy%C3%AAn-D%E1%BB%A5ng-i.954274863.23824593163?sp_atk=b687206c-d197-40a7-9d70-90e3cf2b2040&xptdk=b687206c-d197-40a7-9d70-90e3cf2b2040, Price=0.133, Stock=11
U2: library part IC_XL6009_TO-263, "400KHz 42V 5A Switching Current Boost DC/DC Converter, Wide 3.6V to 36V Input Voltage Range.", Package=SMD, Temperature Range="-25 to +85 degC", ComponentLink1Description=Datasheet, ComponentLink1URL=E:\NEW_DATA\ELECTRONIC_DOCUMENT\DATASHEET\XL6009.pdf, Container=COMMON_IC, Label=MODULATORS, Manufacturer=https://shopee.vn/B%E1%BB%99-5-Linh-Ki%E1%BB%87n-%C4%90i%E1%BB%87n-T%E1%BB%AD-XL4015E1-HS4015E1-TO263-XL4015-TO263-5-4015E1-TO-263-IBUW-XL4005E1-XL4005-XL6006E1-XL6006-XL6009E1-XL6009-XL6019E1-XL6019-i.827232370.11197288834?sp_atk=157a3557-8b9b-4be9-acdb-b91832632816&xptdk=157a3557-8b9b-4be9-acdb-b91832632816, Price=0.35, Stock=0
U4 U9: library part IC_7805_TO-252, "µA7800 SERIES POSITIVE-VOLTAGE REGULATORS, Imax=1.5A", Package=SMD, Temperature Range="-65 to +150 degC", ComponentLink1Description=Datasheet, ComponentLink1URL=E:\NEW_DATA\ELECTRONIC_DOCUMENT\DATASHEET\LM7805.pdf, Container=COMMON_IC, Label=REGULATOR, Manufacturer=https://shopee.vn/Set-10-linh-ki%E1%BB%87n-%C4%91i%E1%BB%87n-t%E1%BB%AD-78M05-TO252-7805-L78M05CDT-78M06-78M08-78M09-78M12-78M15-7806-7808G-i.395117932.9460732059, Price=0.065, Stock=8
U5 U7 U8 U12: library part IC_OPTO_PC817C_DIP-4, "PC817X Series, DIP 4pin General, Purpose Photocoupler.", Package=TH, Temperature Range="-30 to +100 degC", ComponentLink1Description=Datasheet, ComponentLink1URL="E:\NEW_DATA\ELECTRONIC_DOCUMENT\DATASHEET\PC817X Series.pdf", Container=COMMON_IC, Label=PC817C, Manufacturer=https://shopee.vn/S%E1%BA%A3n-ph%E1%BA%A9m-Opto-PC817-Sharp-5V-5mA-i.311128107.8022468113, Price=0.1, Stock=4
U6 U11: library part IC_TL431_SOT-23, "PROGRAMMABLE PRECISION / REFERENCE, Vmax=36V", Package=SMD, Temperature Range="-40 to +125 degC", ComponentLink1Description=Datasheet, ComponentLink1URL=E:\NEW_DATA\ELECTRONIC_DOCUMENT\DATASHEET\TL431.pdf, Container=COMMON_IC, Label=TL431, Manufacturer=https://shopee.vn/B%E1%BB%99-100-M%E1%BA%A1ch-%C4%90i%E1%BB%87n-SS8050-Y1-SS8550-Y2-S8050-J3Y-S8550-2TY-S9012-S9013-S9014-S9015-S9018-TL431-XC6206P332MR-SOT23-XC6206P332-i.778834786.17075451311, Price=0.013, Stock=0
U10: library part IC_AMS1117_3V3_TO-252, "1A LOW DROPOUT VOLTAGE REGULATOR, Vmax 15V", Package=SMD, Temperature Range="-40 to +125 degC", ComponentLink1Description=Datasheet, ComponentLink1URL=E:\NEW_DATA\ELECTRONIC_DOCUMENT\DATASHEET\ds1117.pdf, Container=COMMON_IC, Label=AMS1117, Manufacturer=https://shopee.vn/Set-70-B%E1%BB%99-%C4%90i%E1%BB%81u-Ch%E1%BB%89nh-%C4%90i%E1%BB%87n-%C3%81p-AMS1117-1.2V-1.5V-1.8V-2.5V-3.3V-5.0V-ADJ-AMS1117-3.3V-AMS1117-3.3-AMS1117-5.0-7-Gi%C3%A1-Tr%E1%BB%8B-M%E1%BB%97i-Lo%E1%BA%A1i-i.778834786.19805430939?sp_atk=74066310-54b3-4280-a069-18140e90727b&xptdk=74066310-54b3-4280-a069-18140e90727b, Price=0.11, Stock=10
Z1: library part ZENER_6V8_0.3W_SOD323, "Voltage regulator diodes, BZX384 series", Package=SMD, Power=300mW, Temperature Range="-65 to +150 degC", ComponentLink1Description=Datasheet, ComponentLink1URL=E:\NEW_DATA\ELECTRONIC_DOCUMENT\DATASHEET\0900766b813e43ab.pdf, Container=Diodes_Box, Label=BZT52C6V8, Manufacturer=https://shopee.vn/Set-270-%C4%91i-%E1%BB%91t-%E1%BB%95n-%C3%A1p-(2V4-33V)-1-2W-chuy%C3%AAn-d%E1%BB%A5ng-i.101758806.1635771682, Price=0.008, Stock=93
Z2: library part ZENER_10V_0.3W_SOD-323, "Voltage regulator diodes, BZX384 series", Package=SMD, Power=300mW, Temperature Range="-65 to +150 degC", ComponentLink1Description=Datasheet, ComponentLink1URL=E:\NEW_DATA\ELECTRONIC_DOCUMENT\DATASHEET\0900766b813e43ab.pdf, Container=Diodes_Box, Label=BZT52C10V, Manufacturer=https://shopee.vn/Set-100-%C4%90i%E1%BB%91t-SMD-0805-0.25W-BZT52C10V-3V3-7V5-6V8-5V6-5V1-4V7-12V-10V-15V-16V-18V-20V-24V-SOD-323-i.778834786.18605884639, Price=0.008, Stock=99, Vbreak=10

## Via types
v1: diameter 1.27, hole 0.6, Top Layer to Bottom Layer, 36 vias
v2: diameter 3, hole 3, Top Layer to Bottom Layer, 4 vias
v3: diameter 3, hole 1.2, Top Layer to Bottom Layer, 2 vias

## Nets (pads, with @x,y where several pads share a name; then routed paths per layer and width w, separated by ;. In a path a pad name is that pad's centre, name@x,y a point inside that pad or via, vN(x,y) a via of type N, cw(c..) or ccw(c..) an arc to the next point about the centre after c; other vN are vias at no path point)
+3V3_REG: C18.1 C19.2 M3.2 R31.1 R34.2 R35.2 U10.2 | length 2.3
  Bottom Layer w0.381: R31.1 -39.109,-28.284 ; R34.2 -31.489,-28.284
  other v1: -27.02,-25.484 -25.006,-25.484 -22.991,-25.484
+5V_NON: C12.1 R19.2 R23.2 R26.2 R28.2 U5.4 U9.3 | length 52.7
  Bottom Layer w0.381: R19.2 U5.4 -34.219,-4.67 -33.644,-5.245 -32.78,-5.245 ; R28.2 -12.297,4.472 -12.003,4.178 -11.343,4.178 -10.809,3.645 -10.809,1.724 ; -11.952,-5.245 -11.292,-5.245 -10.809,-4.763 -10.809,1.724 ; R26.2 -10.809,1.724
  Bottom Layer w0.635: -32.78,-5.245 -28.081,-5.245 ; C12.1 -25.41,3.192 -25.712,2.89 R23.2 -27.513,1.724 -28.081,1.156 -28.081,-5.245 ; -11.952,-5.245 -28.081,-5.245
+5V_REG: C7.2 C16.2 R30.2 R38.2 U1.8 U3.8 U4.3 | length 13
  Bottom Layer w0.381: C7.2 -6.154,-18.145 cw(c-5.752,-18.145) -5.752,-17.743 4.455,-17.743 ccw(c4.455,-17.342) 4.856,-17.342 R38.2
  other v1: -18.314,-20.757 -16.3,-20.757
+5V_UNREG: C5.1 C15.2 C17.2 D1.2 R1.1 R3.2 R18.2 R20.2 U4.1 U10.3
  other v1: -25.468,-16.31
BOOT: C22.2 M3.25 R35.1 S2.1 | length 32.6
  Top Layer w0.381: M3.25 v1(-45.459,-38.918) -45.459,-37.746 cw(c-44.506,-37.746) -44.506,-36.793 S2.1@-19.843,-36.793
  Bottom Layer w0.381: v1(-45.459,-38.918) R35.1 C22.2
DAC: M3.10 R25.1 | length 27
  Top Layer w0.381: v1(-40.379,-24.484) M3.10
  Bottom Layer w0.381: v1@-40.379,-24.147 -40.379,-21.245 cw(c-39.535,-21.245) -39.535,-20.401 -23.842,-20.401 ccw(c-23.842,-19.731) -23.172,-19.731 R25.1 R25.1@-23.172,-15.467
EN-IN: M3.9 R31.2 U8.4 | length 41.9
  Top Layer w0.381: v1(-39.109,-25.484) M3.9
  Bottom Layer w0.381: R31.2 v1(-39.109,-25.484) -39.109,-21.893 cw(c-38.265,-21.893) -38.265,-21.049 -23.751,-21.049 ccw(c-23.751,-19.731) -22.433,-19.731 -22.433,-18.135 cw(c-20.712,-18.135) -20.712,-16.414 -15.507,-16.414 ccw(c-15.507,-15.572) -14.665,-15.572 U8.4 cw(c-14.665,-10.593) U8.4@-14.61,-10.593
EN-MCU: C21.2 M3.3 R34.1 S1.1 | length 32.6
  Top Layer w0.381: M3.3 v1(-31.489,-25.484) -31.489,-33.758 ccw(c-29.682,-33.758) -29.682,-35.565 -16.046,-35.565 cw(c-16.046,-36.268) -15.343,-36.268 S1.1@-15.343,-36.793
  Bottom Layer w0.381: v1(-31.489,-25.484) R34.1 C21.2
GND: C2.2 C3.2 C9.1 C10.2 C11.2 C12.2 C14.1 C20.1 C23.1 D8.3 Q2.3 Q3.3 R17.2 R21.1 R29.1 R33.1 U2.1 U7.3 U8.2 U9.2 U12.3 Z2.1 | length 3.6
  Bottom Layer w0.381: Z2.1 -38.944,1.793 -38.597,1.446 R17.2 C10.2
  other v1: -21.195,-3.995 -19.181,-3.995 -4.842,8.045 -4.842,13.55 -2.827,13.601 -0.813,13.652
HVREF: C27.2 M3.7 U3.6 U3.7 | length 35.9
  Top Layer w0.381: v1(-36.569,-25.484) M3.7
  Bottom Layer w0.381: C27.2 -37.099,-26.176 cw(c-36.709,-26.176) -36.985,-25.899 v1(-36.569,-25.484) -36.569,-23.323 cw(c-35.725,-23.323) -35.725,-22.479 -15.272,-22.479 cw(c-15.272,-24.201) -13.55,-24.201 U3.6 U3.7
IGND: C5.2 C7.1 C15.1 C16.1 C17.1 C18.2 C19.1 C21.1 C22.1 C25.1 C26.1 C27.1 D3.1 L1.4 M3.1 M3.15 M3.38 R3.1 R22.1 R36.1 R39.1 S1.2 S2.2 U1.4 U3.4 U4.2 U6.3 U7.2 U8.3 U10.1 U11.3 U12.2 | length 25
  Top Layer w0.381: S2.2@-17.843,-41.118 -17.843,-38.955 ; S2.2@-17.843,-36.793 -17.843,-38.955 ; -13.343,-33.517 -13.343,-36.793 -13.343,-38.955 ; v1(-10.495,-41.118) -13.343,-41.118 -13.343,-38.955 ; -17.843,-38.955 -13.343,-38.955
  Bottom Layer w0.381: C22.1 -43.652,-33.832 ; -37.099,-30.57 C27.1 ; -35.299,-30.57 C26.1 ; -33.499,-30.57 C25.1 ; -29.689,-30.57 C21.1
  other v1: -27.059,-31.317 -25.044,-31.317 -23.03,-31.317 -19.376,-28.976
NetC1_1: C1.1 R1.2 | length 1.5
  Bottom Layer w0.635: C1.1 R1.2
NetC1_2: C1.2 D1.1 L1.3
NetC4_1: C4.1 R7.2 | length 8.9
  Bottom Layer w0.635: C4.1 -54.175,-4.336 -53.11,-5.401 R7.2
NetC6_1: C6.1 D4.2 R2.1
NetC8_1: C8.1 R12.2 R38.1 R39.2 U1.5 | length 19.7
  Bottom Layer w0.381: U1.5 1.256,-19.452 cw(c1.822,-19.452) 1.822,-18.886 C8.1@3.368,-18.886 ; C8.1 5.263,-18.886 ccw(c5.263,-17.149) 7,-17.149 R39.2 R12.2
NetC8_2: C8.2 D3.2 R8.2 U1.3 | length 23.7
  Bottom Layer w0.381: D3.2 U1.3 -0.014,-16.034 ccw(c0.552,-16.034) 0.552,-16.6 C8.2 ; R8.2 2.94,-5.943 cw(c2.94,-8.86) 5.857,-8.86 5.857,-14.446 cw(c5.074,-14.446) 5.074,-15.229 3.88,-15.229 ccw(c3.88,-16.052) 3.056,-16.052 C8.2 ; C8.2@3.056,-16.612 C8.2
NetC9_2: C9.2 U2.4 Z1.1 | length 8.9
  Top Layer w0.381: U2.4 -39.4,7.943 -38.814,7.357 C9.2
  Bottom Layer w0.635: Z1.1 -39.678,9.167 -39.207,9.639 -38.14,9.639 -37.602,9.102 C9.2
NetC10_1: C10.1 Q1.2 R17.1 U2.2 | length 7.2
  Top Layer w0.381: U2.2 -39.4,4.543 -38.814,5.129 C10.1
  Bottom Layer w0.381: Q1.2 -38.868,3.732 R17.1 C10.1
NetC11_1: C11.1 R14.1 U9.1
NetC13_1: C13.1 U5.2 U6.1 | length 7.7
  Bottom Layer w0.381: C13.1 U5.2 -28.152,-10.539 -27.757,-10.934 U6.1
NetC13_2: C13.2 C24.1 | length 1.8
  Bottom Layer w0.381: C13.2 C24.1
NetC14_2: C14.2 R24.1 | length 5.3
  Bottom Layer w0.381: R24.1 -23.172,0.958 -22.76,0.546 -21.77,0.546 -21.372,0.148 C14.2 -21.372,-1.231 -21.195,-1.408 v1(-21.195,-2.195)
NetC24_2: C24.2 R20.1 R22.2 U6.2 | length 12.6
  Bottom Layer w0.381: R20.1 -36.019,-14.106 -35.667,-14.458 -29.879,-14.458 ; U6.2 -29.657,-12.41 -29.879,-12.632 C24.2 -29.879,-14.458 ; R22.2 -28.079,-14.782 -28.403,-14.458 -29.879,-14.458
NetD4_1: D4.1 L1.2 R7.1 U2.3 | length 5.2
  Bottom Layer w0.635: R7.1 L1.2 D4.1
NetD7_1: D7.1 R26.1 U12.4 | length 4.9
  Bottom Layer w0.381: U12.4 R26.1 D7.1
NetD7_2: D7.2 Q3.1 R29.2 | length 7
  Bottom Layer w0.381: R29.2 -9.503,5.332 -9.299,5.536 Q3.1 -8.557,4.06 -8.219,3.721 -6.644,3.721 -6.157,3.235 D7.2
NetD8_1: D8.1 J2.1
NetD8_2: D8.2 F1.2
NetF1_1: F1.1 J2.2
NetJ4_1: R32.1 R33.2 | length 7.9
  Bottom Layer w0.381: v1(-19.181,-2.195) -19.181,-0.914 -18.863,-0.596 R33.2 -17.205,0.148 -16.806,0.546 -15.076,0.546 -14.665,0.958 R32.1 R32.1@-14.873,1.69
NetQ1_1: Q1.1 R6.1 R9.2 | length 5.2
  Bottom Layer w0.381: R6.1 -45.043,5.493 -44.668,5.118 -44.668,3.899 -44.362,3.593 R9.2 Q1.1
NetQ2_1: Q2.1 Q3.2 R28.1 | length 19.3
  Top Layer w0.381: v1(-12.781,-0.596) Q2.1
  Bottom Layer w0.381: v1(-12.781,-0.596) -12.781,2.899 -13.908,4.026 -13.908,6.744 -13.034,7.618 R28.1 -12.297,6.758 -12.003,6.464 -6.179,6.464 Q3.2
NetR4_1: R4.1 R5.2 U3.2 | length 11.8
  Bottom Layer w0.381: U3.2 R5.2 -12.28,-36.198 ccw(c-11.673,-36.198) -11.673,-36.804 -8.315,-36.804 ccw(c-8.315,-35.899) -7.41,-35.899 R4.1
NetR4_2: R4.2 R10.1 U1.1 | length 23.1
  Top Layer w0.381: v1(-4.354,-22.368) v1(-4.354,-14.918)
  Bottom Layer w0.381: R4.2 -7.41,-23.202 cw(c-6.576,-23.202) -6.576,-22.368 v1(-4.354,-22.368) ; v1(-4.354,-14.918) -4.354,-13.902 cw(c-3.57,-13.902) R10.1 -3.062,-13.118 cw(c-3.062,-13.626) -2.554,-13.626 U1.1
NetR9_1: R9.1 Z2.2 | length 4.6
  Bottom Layer w0.381: R9.1 -45.822,2.31 -45.305,1.793 Z2.2
NetR10_2: R10.2 R11.1 U1.2 | length 6.3
  Bottom Layer w0.381: R11.1 -1.85,-16.6 ccw(c-1.85,-16.034) -1.284,-16.034 U1.2 R10.2
NetR11_2: R11.2 R13.2 U1.6 | length 7.7
  Bottom Layer w0.381: R11.2 -3.084,-18.886 -0.58,-18.886 cw(c-0.58,-19.452) -0.014,-19.452 U1.6 -0.014,-21.142 ccw(c1.721,-21.142) R13.2
NetR13_1: R13.1 R15.2 U1.7 | length 12.4
  Bottom Layer w0.381: R15.2 -5.61,-25.157 cw(c-4.825,-25.157) -4.825,-24.373 -3.795,-24.373 ccw(c-3.795,-23.635) -3.057,-23.635 -3.057,-23.202 cw(c-2.223,-23.202) R13.1@-2.223,-22.368 ; R13.1 ccw(c-3.018,-21.142) -1.284,-21.142 U1.7
NetR15_1: R15.1 R16.2 U3.3 | length 21.7
  Bottom Layer w0.381: U3.3 -13.55,-36.074 ccw(c-11.651,-36.074) -11.651,-37.973 -7.197,-37.973 ccw(c-7.197,-36.385) -5.61,-36.385 R15.1 -5.61,-32.175 ccw(c-6.085,-32.175) -6.085,-31.699 -8.734,-31.699 ccw(c-8.734,-32.175) -9.21,-32.175 R16.2
NetR18_1: R18.1 U5.1 | length 2.8
  Bottom Layer w0.381: R18.1 U5.1
NetR19_1: R19.1 R21.2 U2.5 U5.3 | length 22.2
  Top Layer w0.381: U2.5 v1@-40.748,10.765
  Bottom Layer w0.381: v1(-40.748,11.043) -39.709,11.043 -39.3,10.634 -36.459,10.634 -34.219,8.393 R19.1 -34.219,0.971 -33.87,0.622 -32.044,0.622 -31.679,0.257 R21.2 U5.3
NetR23_1: R23.1 R24.2 U7.4 | length 4.9
  Bottom Layer w0.381: U7.4 R23.1 -25.677,-0.596 R24.2
NetR25_2: R25.2 U7.1 | length 4.9
  Bottom Layer w0.381: U7.1 -25.712,-12.41 ccw(c-24.821,-12.41) -24.821,-13.301 R25.2
NetR27_2: R27.2 U12.1 | length 2.8
  Bottom Layer w0.381: R27.2 U12.1
NetR32_2: R32.2 U8.1 | length 2.3
  Bottom Layer w0.381: U8.1 R32.2
NetR36_2: R36.2 R37.1 U3.5 | length 6.8
  Bottom Layer w0.381: R36.2 ccw(c-18.356,-26.69) -18.356,-26.709 R37.1 -16.62,-25.848 cw(c-16.09,-25.848) -16.09,-25.318 -15.35,-25.318 cw(c-15.35,-25.848) -14.82,-25.848 U3.5
PWM: M3.8 R27.1 | length 37.8
  Top Layer w0.381: v1(-37.839,-24.484) M3.8
  Bottom Layer w0.381: v1(-37.839,-24.484) -37.839,-22.684 ; -37.839,-22.608 cw(c-36.995,-22.608) -36.995,-21.764 -23.728,-21.764 ccw(c-23.728,-19.817) -21.782,-19.817 -21.782,-18.126 cw(c-20.717,-18.126) -20.717,-17.061 -9.403,-17.061 ccw(c-9.403,-16.355) -8.697,-16.355 R27.1
RX-MCU: M3.34 | length 31.2
  Top Layer w0.381: M3.34 -34.029,-42.114 ccw(c-32.932,-42.114) -32.932,-43.211 -7.541,-43.211 ccw(c-7.541,-42.136) -6.466,-42.136 v1(-6.466,-41.118)
TC+: C2.1 C3.1 C4.2 C6.2 C20.2 C23.2 D8.4 L1.1 Q1.3 R2.2 R6.2 R12.1 R14.2 Z1.2 | length 9.7
  Bottom Layer w0.381: R6.2 Q1.3 -42.078,6.39 -42.726,7.038 Z1.2 ; R12.1 v3(7,0)
  Bottom Layer w0.635: Z1.2 -42.726,9.836
TC-: Q2.2 R8.1 | length 3.7
  Bottom Layer w0.381: R8.1 v3(0,0)
  other v1: -12.51,13.55 -10.495,13.55 -8.481,13.55
TX-MCU: M3.35 | length 26.9
  Top Layer w0.381: M3.35 -32.759,-41.883 ccw(c-32.143,-41.883) -32.143,-42.5 -9.155,-42.5 ccw(c-9.155,-41.826) -8.481,-41.826 v1(-8.481,-41.118)
V+: 
VREF: C26.2 M3.6 R16.1 R30.1 R37.2 U11.1 U11.2 | length 40.7
  Top Layer w0.381: v1(-35.299,-24.484) M3.6
  Bottom Layer w0.381: C26.2 v1(-35.299,-24.484) ; v1@-35.299,-24.038 cw(c-34.455,-24.038) -34.455,-23.194 -20.891,-23.194 cw(c-20.891,-24.363) -19.722,-24.363 -19.722,-26.997 ccw(c-18.85,-26.997) -18.85,-27.869 -17.117,-27.869 cw(c-17.117,-28.366) -16.62,-28.366 R37.2 ; U11.1 U11.2 -16.527,-29.088 ccw(c-16.62,-29.088) R37.2 ; R16.1 R30.1 R37.2
VTHEL: C25.2 M3.5 R5.1 U3.1 | length 39.8
  Top Layer w0.381: v1(-34.029,-25.484) M3.5
  Bottom Layer w0.381: C25.2 -33.499,-26.176 ccw(c-33.89,-26.176) -33.614,-25.899 v1(-34.029,-25.484) -34.029,-24.753 cw(c-33.185,-24.753) -33.38,-23.932 ; -33.382,-23.942 cw(c-33.349,-23.942) -33.38,-23.932 ; R5.1 -10.502,-35.017 cw(c-10.502,-34.509) -11.01,-34.509 U3.1 -11.01,-32.278 ccw(c-11.492,-32.278) -11.492,-31.795 -19.278,-31.795 cw(c-19.278,-30.487) -20.585,-30.487 -20.585,-24.513 ccw(c-21.19,-24.513) -21.19,-23.909 -33.349,-23.909 ccw(c-33.349,-23.942) -33.38,-23.932
pads on no net: M3.4 M3.11 M3.12 M3.13 M3.14 M3.16 M3.17 M3.18 M3.19 M3.20 M3.21 M3.22 M3.23 M3.24 M3.26 M3.27 M3.28 M3.29 M3.30 M3.31 M3.32 M3.33 M3.36 M3.37 M3.101
copper on no net:
  other v2: -56.983,-44.176 10.017,-44.176 -56.983,45.824 10.017,45.824

## Polygon pours and split planes (outlines as drawn)
no net on Top Overlay (solid): -16.978,13.994
IGND on Top Layer "IGND_L01_P118" (solid, pour order 118): -14.788,-20.706 -14.788,-27.539 -30.575,-27.539 -30.575,-34.219 -9.81,-34.219 -9.81,-20.706
IGND on Top Layer "Top Layer-IGND" (solid, pour order 126): -4.425,-7.549 -35.362,-7.549 -38.994,-11.181 -55.581,-11.181 -55.581,-15.728 -48.951,-15.728 -36.556,-15.728 -36.556,-12.223 -3.18,-12.223 -3.18,-9.276 9.384,-9.276 9.384,0 -1.986,0 -1.986,-5.111
IGND on Top Layer "IGND_L01_P108" (solid, pour order 108): -29.444,-8.159 -29.444,-23.678 -21.316,-23.678 -21.316,-18.75 -19.629,-18.75 -19.629,-17.963 -14.788,-17.963 -14.788,-24.559 2.001,-24.559 2.001,-13.848 -14.788,-13.848 -14.788,-16.439 -19.639,-16.439 -19.639,-14.686 -23.856,-14.686 -23.856,-17.553 -28.326,-17.553 -28.326,-8.159
+5V_UNREG on Top Layer "+5V_UNREG_L01_P104" (solid, pour order 104): -28.047,-12.502 -28.047,-17.274 -24.135,-17.274 -24.135,-14.458 -19.36,-14.458 -19.36,-16.146 -15.067,-16.146 -15.067,-13.569 2.279,-13.569 2.279,-24.559 9.384,-24.559 9.384,-9.556 -2.901,-9.556 -2.901,-12.502
+3V3_REG on Top Layer "+3V3_REG_L01_P114" (solid, pour order 114): -29.705,-23.678 -29.705,-23.957 -21.036,-23.957 -21.036,-21.875 -15.067,-21.875 -15.067,-27.243 -30.575,-27.243 -30.575,-23.678
no net on Top Layer "Top Layer-No Net 1" (solid, pour order 124): -4.804,-7.844
no net on Top Layer "Top Layer-No Net 2" (solid, pour order 116): -25.075,-23.195
+5V_REG on Top Layer "+5V_REG_L01_P110" (solid, pour order 110): -19.36,-18.217 -19.36,-19.03 -21.036,-19.03 -21.036,-21.57 -15.067,-21.57 -15.067,-18.217
no net on Top Layer "Top Layer-No Net 3" (solid, pour order 106): -29.495,-12.426
+3V3_REG on Top Layer "+3V3_REG_L01_P102" (solid, pour order 102): -36.285,-12.502 -36.285,-20.706 -30.829,-20.706 -30.829,-23.678 -29.705,-23.678 -29.705,-12.502
NetC11_1 on Top Layer "NETC11_1_L01_P046" (solid, pour order 46): -26.1,9.131 -24.391,9.131 -24.391,15.583 1.56,15.583 1.56,1.537 5.574,1.537 5.574,17.793 -26.1,17.793
GND on Top Layer "Top Layer-GND" (solid, pour order 82): -10.089,4.229 -10.089,-0.596 -3.79,-0.597 -3.79,12.619 0.113,12.619 0.113,14.684 -5.767,14.684 -5.767,4.229
GND on Top Layer "GND_L01_P056" (solid, pour order 56): -23.202,10.937 -20.535,10.937 -20.535,-1.103 -3.79,-1.103 -3.79,-4.145 -5.243,-5.598 -42.297,-5.598 -42.297,-4.331 -42.957,-4.331 -42.957,3.674 -36.43,3.674 -36.43,-1.103 -23.202,-1.103
no net on Top Layer "Top Layer-No Net" (solid, pour order 80): -9.406,3.627
GND on Top Layer "GND_L01_P078" (solid, pour order 78): -38.614,13.478 -38.614,11.396 -36.285,11.396 -36.285,5.96 -29.705,5.96 -29.705,13.479
NetD4_1 on Top Layer "NETD4_1_L01_P064" (solid, pour order 64): -55.581,12.382 -55.581,-9.739 -42.585,-9.739 -42.585,-4.71 -51.983,-4.71 -51.983,1.337 -44.487,1.337 -44.487,12.382
no net on Top Layer "NONET_L01_P062" (solid, pour order 62): -55.01,0.643
no net on Top Layer "NONET_L01_P060" (solid, pour order 60): -55.079,0.65
no net on Top Layer "NONET_L01_P058" (solid, pour order 58): -55.079,0.65
+5V_NON on Top Layer "+5V_NON_L01_P050" (solid, pour order 50): -23.763,3.924 -31.51,3.924 -31.51,0.292 -29.885,0.292 -29.885,2.502 -23.763,2.502
NetC11_1 on Top Layer "NETC11_1_L01_P048" (solid, pour order 48): -26.1,9.131 -26.1,5.677 -36.082,5.677 -36.082,0.292 -34.457,0.292 -34.457,4.229 -24.391,4.229 -24.391,9.131
no net on Top Layer "NONET_L01_P044" (solid, pour order 44): -26.456,17.615
NetF1_1 on Top Layer "Top Layer-NetF1_1" (solid, pour order 30): -3.621,44.92 -3.621,39.332 -1.64,39.332 -1.64,33.49 -0.218,32.068 9.384,32.068 9.384,41.567 6.031,44.92
NetD8_1 on Top Layer "NETD8_1_L01_P028" (solid, pour order 28): -30.317,40.195 -30.317,35.551 -28.777,34.012 -21.184,34.012 -19.471,35.725 -19.471,37.452 -16.499,37.452 -16.499,39.332 -5.374,39.332 -5.374,44.92 -18.404,44.92 -18.404,40.195
NetD8_2 on Top Layer "NETD8_2_L01_P024" (solid, pour order 24): -35.371,40.195 -35.371,34.531 -32.907,32.067 -8.65,32.068 -7.38,33.337 -7.38,36.881 -18.81,36.881 -18.81,35.344 -20.817,33.337 -29.732,33.337 -31.917,35.522 -31.917,40.195
TC+ on Top Layer "Top Layer-+34V" (solid, pour order 20): -43.372,40.195 -43.372,18.301 -13.045,18.301 -13.045,26.124 9.384,26.124 9.384,31.432 -33.288,31.432 -36.082,34.227 -36.082,40.196
GND on Bottom Layer "Bottom Layer-GND 1" (solid, pour order 142): -11.34,6.94 -6.895,6.94 -6.895,7.194 -3.79,7.194 -3.79,8.896 -11.34,8.896
TC- on Bottom Layer "Bottom Layer-NetM2_2" (solid, pour order 86): -14.39,14.667 -6.601,14.684 -6.601,12.339 2.318,12.339 2.318,-2.921 -2.317,-2.921 -2.317,9.167 -14.39,9.167
IGND on Bottom Layer "Bottom Layer-IGND 1" (solid, pour order 140): -2.901,-9.556 -2.901,-12.155 0.694,-12.155 0.694,-15.838 2.599,-15.838 2.599,-14.441 5.393,-14.441 5.393,-9.556
IGND on Bottom Layer "Bottom Layer-IGND 2" (solid, pour order 138): -28.922,-12.502 -28.922,-13.984 -27.601,-13.984 -27.601,-14.782 -15.714,-14.782 -15.714,-9.133 -7.673,-9.133 -7.673,-17.274 -5.32,-17.274 -5.32,-12.155 5.012,-12.155 5.012,-7.549 -30.113,-7.549 -30.113,-10.072 -27.297,-10.072 -27.297,-9.133 -24.687,-9.133 -24.687,-12.223 -22.211,-12.223 -22.211,-14.06 -26.179,-14.06 -26.179,-12.502
+5V_REG on Bottom Layer "+5V_REG_L02_P136" (solid, pour order 136): -11.01,-28.208 -11.01,-21.172 -8.341,-21.172 -8.341,-28.208
+3V3_REG on Bottom Layer "+3V3_REG_L02_P130" (solid, pour order 130): -28.721,-24.372 -21.316,-24.372 -21.316,-28.665 -45.078,-28.665 -45.078,-35.743 -21.316,-35.743 -21.316,-36.505 -45.84,-36.505 -45.84,-27.903 -28.721,-27.903
IGND on Bottom Layer "Bottom Layer-IGND" (solid, pour order 132): -44.799,-34.219 -14.139,-34.219 -14.139,-32.271 -21.316,-32.271 -21.316,-30.206 -44.799,-30.206
+5V_UNREG on Bottom Layer "+5V_UNREG_L02_P100" (solid, pour order 100): -42.297,-16.642 -42.297,-19.944 -24.135,-19.944 -24.135,-15.042 -26.802,-15.042 -26.802,-16.642 -32.949,-16.642 -32.949,-15.042 -37.038,-15.042 -37.038,-14.559 -38.836,-14.559 -38.836,-16.642
+5V_REG on Bottom Layer "+5V_REG_L02_P128" (solid, pour order 128): -21.036,-18.217 -21.036,-21.57 -5.243,-21.57 -5.243,-20.994 -2.398,-20.994 -2.398,-20.156 -5.319,-20.156 -5.319,-18.216
NetC1_2 on Bottom Layer "NETC1_2_L02_P096" (solid, pour order 96): -51.602,-16.045 -51.602,-19.944 -42.585,-19.944 -42.585,-14.559 -44.871,-14.559 -44.871,-16.045
no net on Bottom Layer "NONET_L02_P094" (solid, pour order 94): -51.516,-4.476
GND on Bottom Layer "Bottom Layer-GND" (solid, pour order 92): 0.113,18.994 0.113,12.619 -5.767,12.619 -5.767,18.994
TC+ on Bottom Layer "Bottom Layer-+34V" (solid, pour order 88): 0.401,31.966 0.401,18.428 4.637,18.428 4.637,-2.621 9.384,-2.621 9.384,31.966